# Altium PCB PCB3.PcbDoc
Units mil, origin at the board's own origin, x right, y up, seen from the top; angles counter-clockwise.
Board outline 1580 x 1705 mil, 2 copper layers (Top Layer, Bottom Layer); 6 components, 10 nets, 42 pads, 0 vias.
Unrouted connection lines stored in the file: 1.
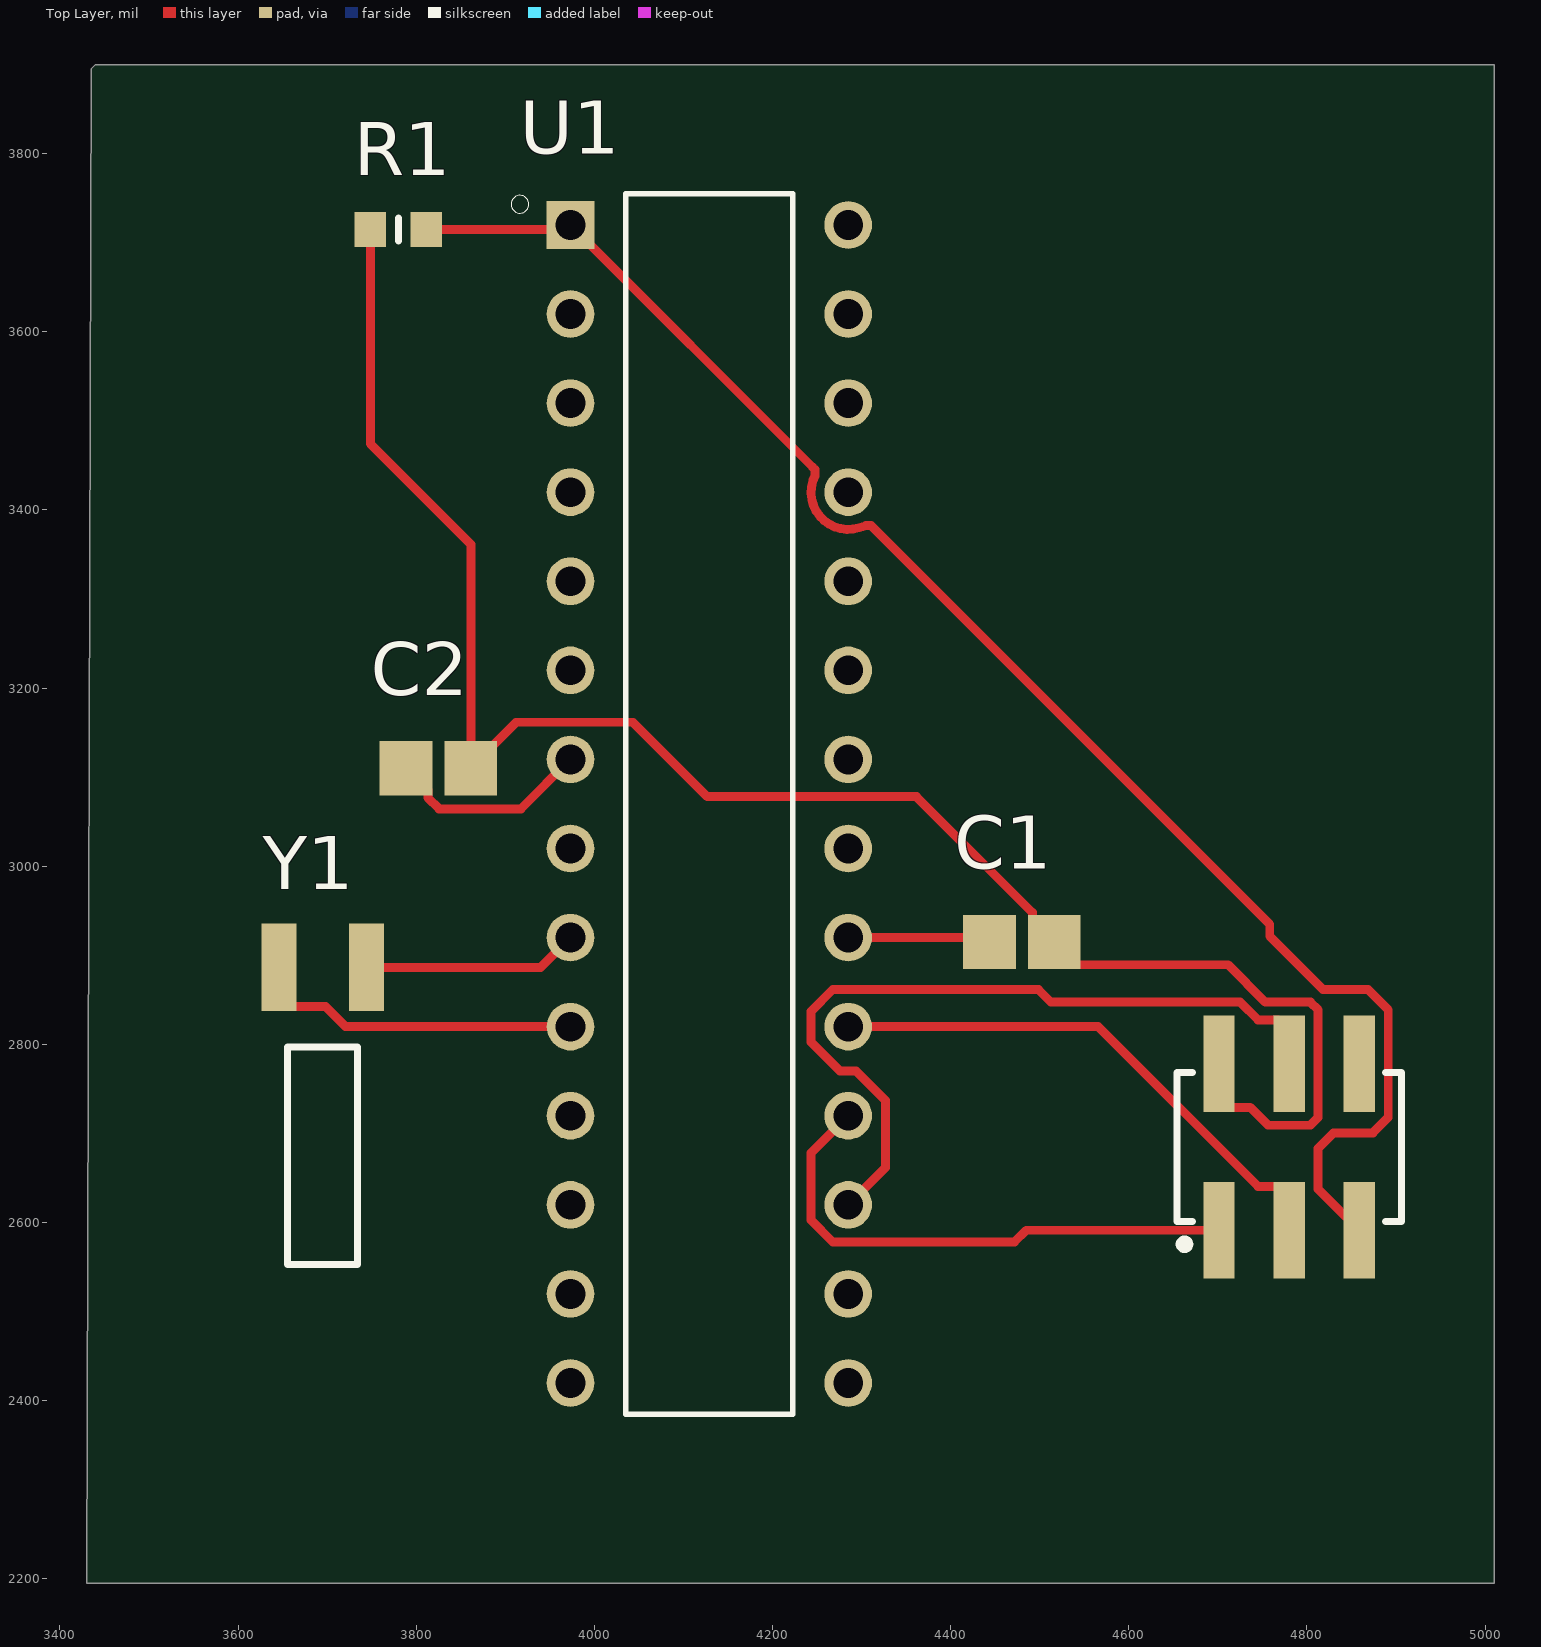
[diagram p0: Top Layer view]
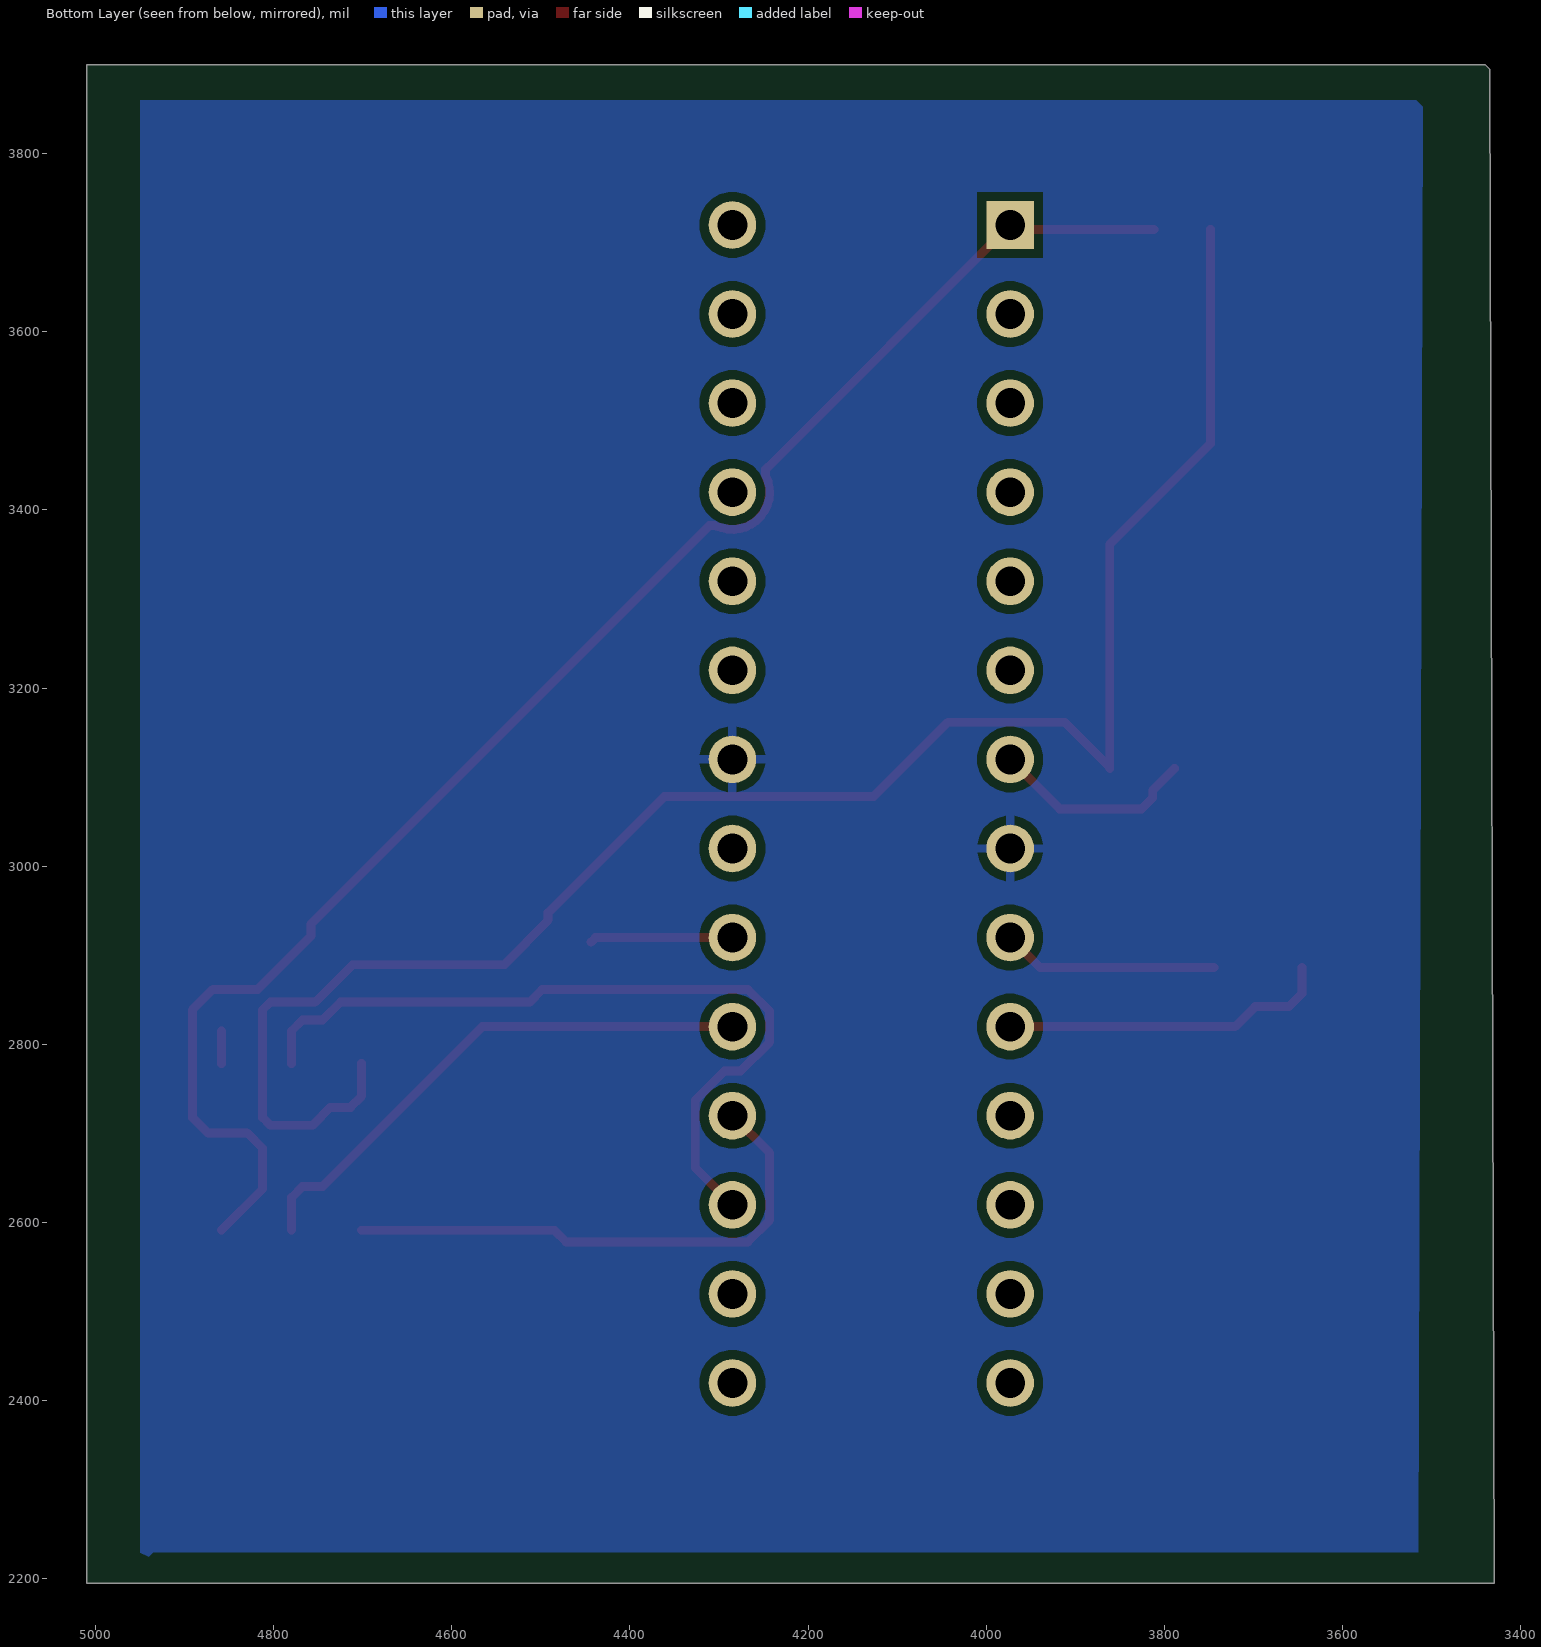
[diagram p1: Bottom Layer view, seen from below]
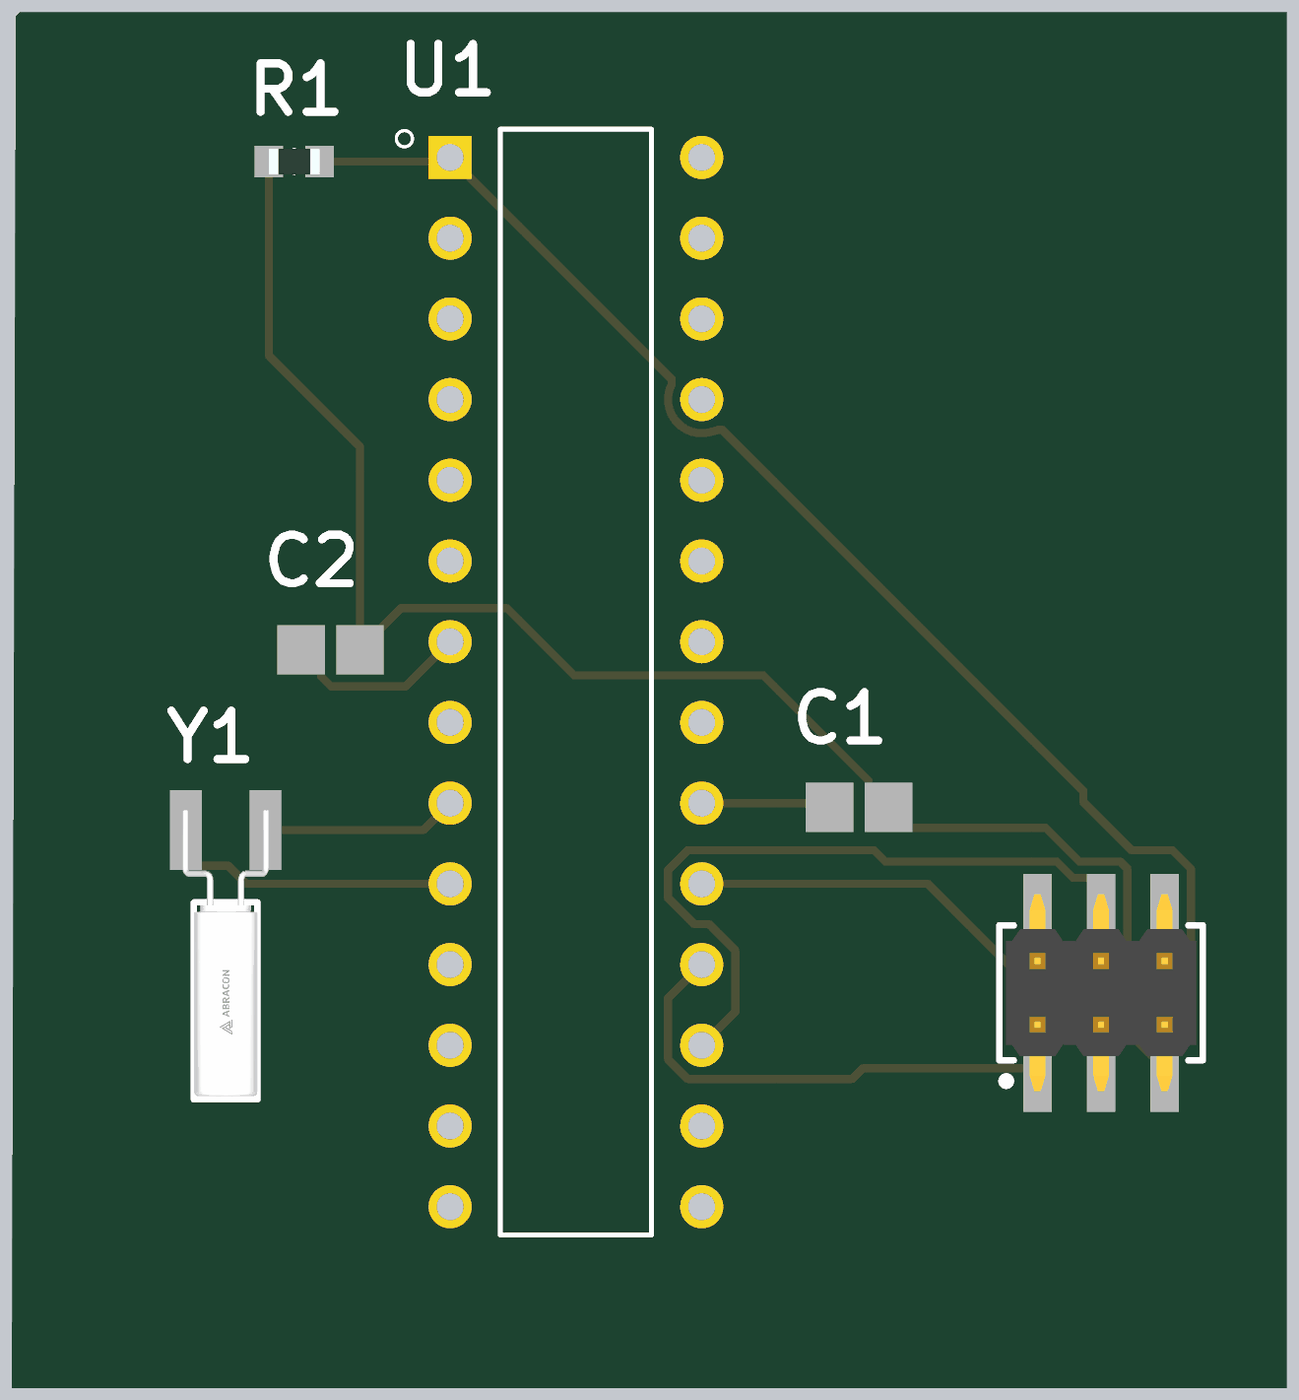
[diagram p2: 3D render of the assembled board from above, using the file's embedded part models]

## Layer stack, top to bottom
Top Solder: solder mask 0.4, Solder Resist, Dk 3.5
Top Layer: signal copper 1.4
Dielectric 1: dielectric 12.6, FR-4, Dk 4.8
Bottom Layer: signal copper 1.4
Bottom Solder: solder mask 0.4, Solder Resist, Dk 3.5

## Board outline
3435,3895 3440,3900 5010,3900 5010,2195 3430,2195

## Design rules (kind name [scope] priority, off if disabled: settings)
Clearance [All] p1: gap=10 ignorepadtopadclearanceinfootprint=FALSE
PolygonConnect [All] p1: connectstyle=Relief reliefconductorwidth=10 reliefentries=4 polygonreliefangle="90 Angle" airgapwidth=10
RoutingVias [All] p1: holewidth=28 width=50 viastyle="Through Hole" minholewidth=28 minwidth=50 maxholewidth=28 maxwidth=50
SolderMaskExpansion [All] p1: expansion=0 istentingtop=FALSE
SupplyNets "Schematic Supply Nets_1" [InNet('+5V')] p1: voltage=0.000
SupplyNets "Schematic Supply Nets" [InNet('GND')] p2: voltage=0.000
Width [All] p1: maxlimit=10 minlimit=10 preferedwidth=10
30 further rules are at their usual default settings.

## Classes and differential pairs
component class Sheet2: C1 C2 R1 U1 Y1

## Components (designator, comment, footprint, x,y, rotation, side; value= is the part's Value field where it differs from the comment)
C1 "VJ0805Y682KXAMT" CAPC2013X145X48ML20T23 4480,2915 r0 top
C2 "VJ0805Y682KXAMT" CAPC2013X145X48ML20T23 3825,3110 r0 top
P1 "621006245821" 621006245821 4780,2685 r0 top
R1 "ERJ-3EKF1001V" RESC1608X55N 3780,3715 r0 top
U1 "ATMEGA328P-PU" DIP794W46P254L2967H457Q28B 4129.09,3070 r0 top
Y1 "Crystal Oscillator" FP-AB26TRB-MFG 3695,2675 r90 top

## Footprints (in the part's own frame and the unit in brackets; to place one, negate y for a bottom-side part, rotate by r counter-clockwise, add the part's x,y. Pads: shape width x height; smd on the part's side, far side on the other; paste and mask are expansions set on the pad)
621006245821 [mm] "Pin Header, pitch 2.00 mm, SMD, Vertical, dual row, 6p"
  rect 0.89x2.75 smd: 1(-2,-2.375) 2(-2,2.375) 3(0,-2.375) 4(0,2.375) 5(2,-2.375) 6(2,2.375)
  silkscreen extent -3.2,-2.9 3.2,2.12, body extent -3,-3.1 3,3.1, height 4.7
CAPC2013X145X48ML20T23 [mm] "Chip Capacitor, 2-Leads, Body 2.00x1.25mm, IPC Low Density"
  rect 1.5x1.55 smd: 1(-0.925,0) 2(0.925,0)
  body extent -1.1,-0.72 1.1,0.72, height 1.45
DIP794W46P254L2967H457Q28B [mm]
  rect 1.358x1.358 hole 0.85: 1(-3.96,16.51)
  round 1.358 hole 0.85: 2(-3.96,13.97) 3(-3.96,11.43) 4(-3.96,8.89) 5(-3.96,6.35) 6(-3.96,3.81) 7(-3.96,1.27) 8(-3.96,-1.27) 9(-3.96,-3.81) 10(-3.96,-6.35) 11(-3.96,-8.89) 12(-3.96,-11.43) 13(-3.96,-13.97) 14(-3.96,-16.51) 15(3.96,-16.51) 16(3.96,-13.97) 17(3.96,-11.43) 18(3.96,-8.89) 19(3.96,-6.35) 20(3.96,-3.81) 21(3.96,-1.27) 22(3.96,1.27) 23(3.96,3.81) 24(3.96,6.35) 25(3.96,8.89) 26(3.96,11.43) 27(3.96,13.97) 28(3.96,16.51)
  silkscreen extent -5.65,-17.4 2.38,17.4
FP-AB26TRB-MFG [mm]
  rect 2.5x1 smd paste+0 mask+0: 1(5.375,1.25) 2(5.375,-1.25)
  silkscreen extent -3.1,-1 3.1,1, body extent -3.2,-1.85 6.73,1.85, height 0.25
RESC1608X55N [mm]
  rect 0.9x1 smd: 1(-0.8,0) 2(0.8,0)
  silkscreen extent 0,-0.33 0,0.33, body extent -0.8,-0.4 0.8,0.4, height 0.45

## Part data
C1 C2: library part CMP-2007-03205-1, Manufacturer=Vitramon, Part Number=VJ0805Y682KXAMT
P1: library part CMP-1502-00996-4, "SMT Vertical Pin Header WR-PHD, Pitch 2.00 mm, Dual Row, 6 pins", Contact Resistance=20mΩ, Current Rating=2A, Operating Supply Voltage=200V, Gender=Male, Lead Pitch=2mm, Number of Pins=6, Orientation=Vertical, RoHS=Non-Compliant
R1: "Resistor", Manufacturer_Name=Panasonic, Mouser Part Number=667-ERJ-3EKF1001V, Arrow Part Number=ERJ-3EKF1001V, Arrow Price/Stock=https://www.arrow.com/en/products/erj-3ekf1001v/panasonic.html?utm_currency=USD&region=asia, Datasheet Link=http://industrial.panasonic.com/cdbs/www-data/pdf/RDA0000/AOA0000C86.pdf, Height=0.55mm, Manufacturer_Part_Number=ERJ-3EKF1001V, Mouser Price/Stock=https://www.mouser.co.uk/ProductDetail/Panasonic/ERJ-3EKF1001V?qs=H7k1u0Mp9JTM8yQxOuvoDg%3D%3D
U1: "ATmega Series 20 MHz 32 KB Flash 2 KB SRAM 8-Bit Microcontroller - DIP-28", Package=None, Availability=Unavailable, MP=ATMEGA328P-PU, Price=None
Y1: library part CMP-27762-006068-1, "CRYSTAL 32.7680KHZ 12.5PF TH", Case/Package=Radial, ESR (Equivalent Series Resistance)=50kR, Frequency=32.768kHz, Frequency Stability=-0.034ppm, Frequency Tolerance=20ppm, Load Capacitance=12.5pF, Max Operating Temperature=85°C, Min Operating Temperature=-40°C, Operating Frequency="32.768 kHz", Package Quantity=500, Depth=1.9mm, Height=0.075inch, Lead Free="Lead Free", Lead Pitch=2.54mm, Length=6mm, Mount="Surface Mount", Number of Pins=2, Packaging="Tape and Reel", REACH SVHC="No SVHC", Series=AB26TRB, Series Resistance=50kR, Termination=Radial, Tolerance=20ppm

## Nets (pads, with @x,y where several pads share a name; then routed paths per layer and width w, separated by ;. In a path a pad name is that pad's centre, name@x,y a point inside that pad or via, vN(x,y) a via of type N, cw(c..) or ccw(c..) an arc to the next point about the centre after c; other vN are vias at no path point)
+5V: C1.2 C2.2 P1.2 R1.1 | length 2047.8
  Top Layer w10: R1.1 3748.5,3474.37 3861.42,3361.46 C2.2 ; C2.2@3861.42,3110.98 3912.17,3161.73 4043.27,3161.73 4126.73,3078.27 4361.57,3078.27 4491.89,2947.95 4491.89,2939.53 C1.2 ; C1.2@4516.42,2914.02 4540.94,2889.49 4711.43,2889.49 4753.28,2847.64 4775,2847.64 4803.73,2847.64 4812.52,2838.85 4812.52,2718.16 4803.73,2709.37 4775,2709.37 4756.27,2709.37 4736.27,2729.37 4713.78,2729.37 4701.26,2741.89 P1.2
GND: P1.6 U1.8 U1.22 | length 36.6
  Top Layer w10: P1.6 P1.6@4858.74,2815.12
NetC1_1: C1.1 U1.20 | length 160.7
  Top Layer w10: U1.20 4438.58,2920 C1.1
NetC2_1: C2.1 U1.7 | length 231.4
  Top Layer w10: C2.1 3813.11,3085.47 3813.11,3077.05 3825.68,3064.49 3917.68,3064.49 U1.7
NetP1_1: P1.1 U1.18 | length 608.2
  Top Layer w10: U1.18 4243.27,2678.27 4243.27,2602.71 4267.71,2578.27 4471.61,2578.27 4484.84,2591.5 P1.1
NetP1_3: P1.3 U1.19 | length 611.1
  Top Layer w10: U1.19 4565.62,2820 4744.99,2640.63 4767.48,2640.63 4780,2628.11 P1.3
NetP1_4: P1.4 U1.17 | length 882.5
  Top Layer w10: U1.17 4326.73,2661.73 4326.73,2737.29 4294.02,2770 4275.98,2770 4243.27,2802.71 4243.27,2837.29 4267.71,2861.73 4498.54,2861.73 4512.64,2847.64 4724.99,2847.64 4744.99,2827.64 4767.48,2827.64 4780,2815.12 P1.4
NetP1_5: P1.5 R1.2 U1.1 | length 1808.6
  Top Layer w10: R1.2 3968.19,3715 U1.1 4244.89,3448.3 4247.82,3445.37 4247.82,3441.22 4247.82,3438.96 ccw(c4285,3420) 4297.2,3380.09 4305.09,3382.49 4306.57,3382.49 4310.7,3382.49 4313.3,3379.89 4758.19,2935 4758.19,2921.47 4817.9,2861.75 4868.36,2861.75 4891.26,2838.85 4891.26,2718.16 4873.94,2700.83 4829.84,2700.83 4812.52,2683.51 4812.52,2637.72 P1.5
NetU1_9: U1.9 Y1.2 | length 242.8
  Top Layer w10: Y1.2 3939.8,2886.61 U1.9
NetU1_10: U1.10 Y1.1 | length 372.3
  Top Layer w10: Y1.1 3645.79,2857.09 3660.47,2842.4 3698.31,2842.4 3720.72,2820 U1.10
pads on no net: U1.2 U1.3 U1.4 U1.5 U1.6 U1.11 U1.12 U1.13 U1.14 U1.15 U1.16 U1.21 U1.23 U1.24 U1.25 U1.26 U1.27 U1.28

## Polygon pours and split planes (outlines as drawn)
GND on Bottom Layer "GND_L02_P000" (solid, pour order 0): 3510,3860 4950,3860 4950,2225 4945,2220 4935,2230 3515,2230